# Altium PCB Payload PC104.PcbDoc (part 1 of 2)
Units mm, origin at the board's own origin, x right, y up, seen from the top; angles counter-clockwise.
Board outline 90.17 x 95.88 mm, 4 copper layers (Top Layer, Int1 (GND), Int2 (PWR), Bottom Layer), stack 1.586 mm thick; 82 components, 45 nets, 364 pads, 982 vias.
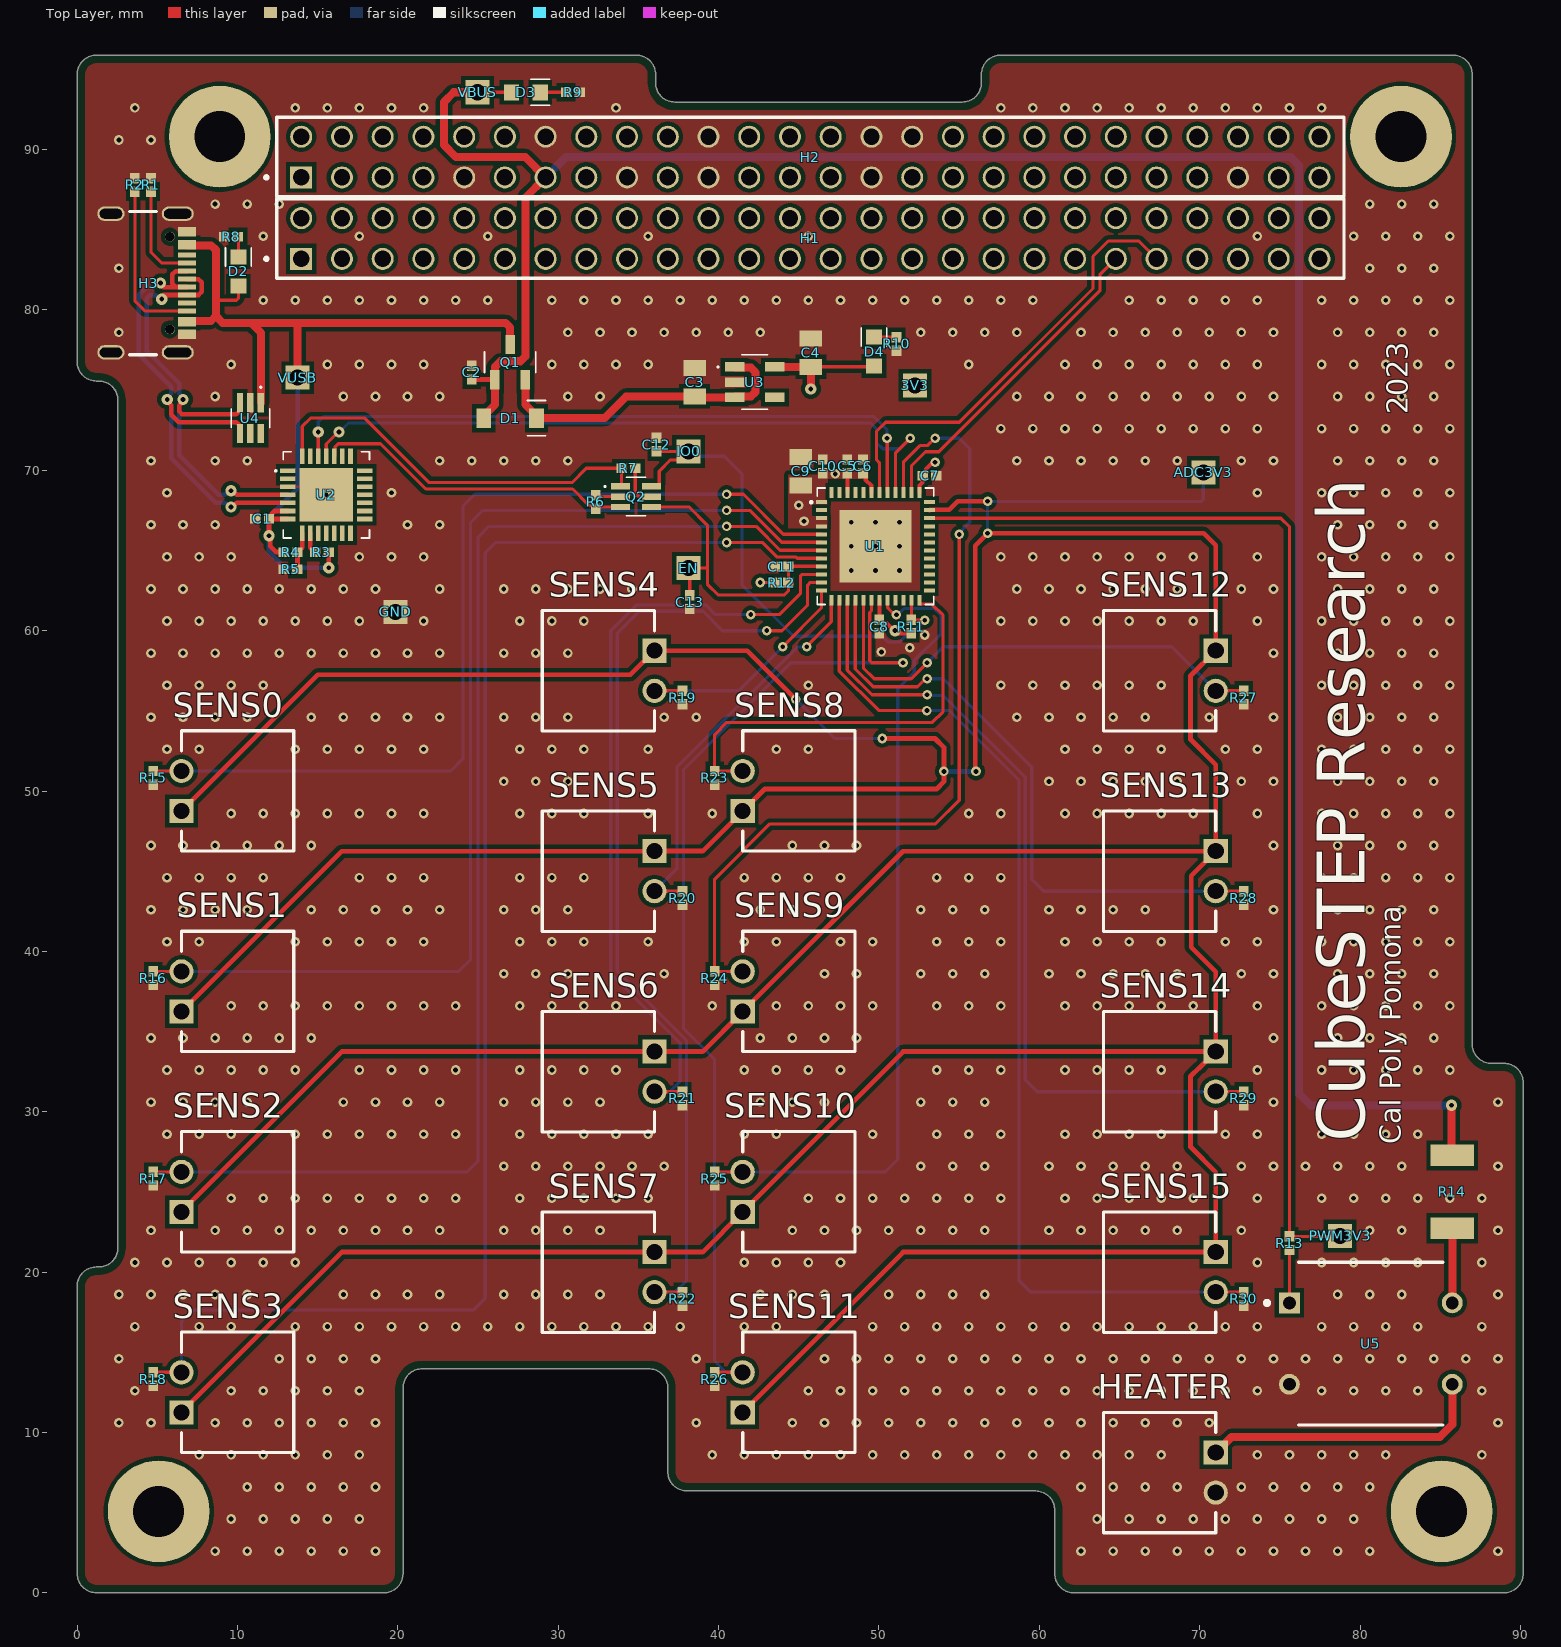
[diagram p0: Top Layer view]
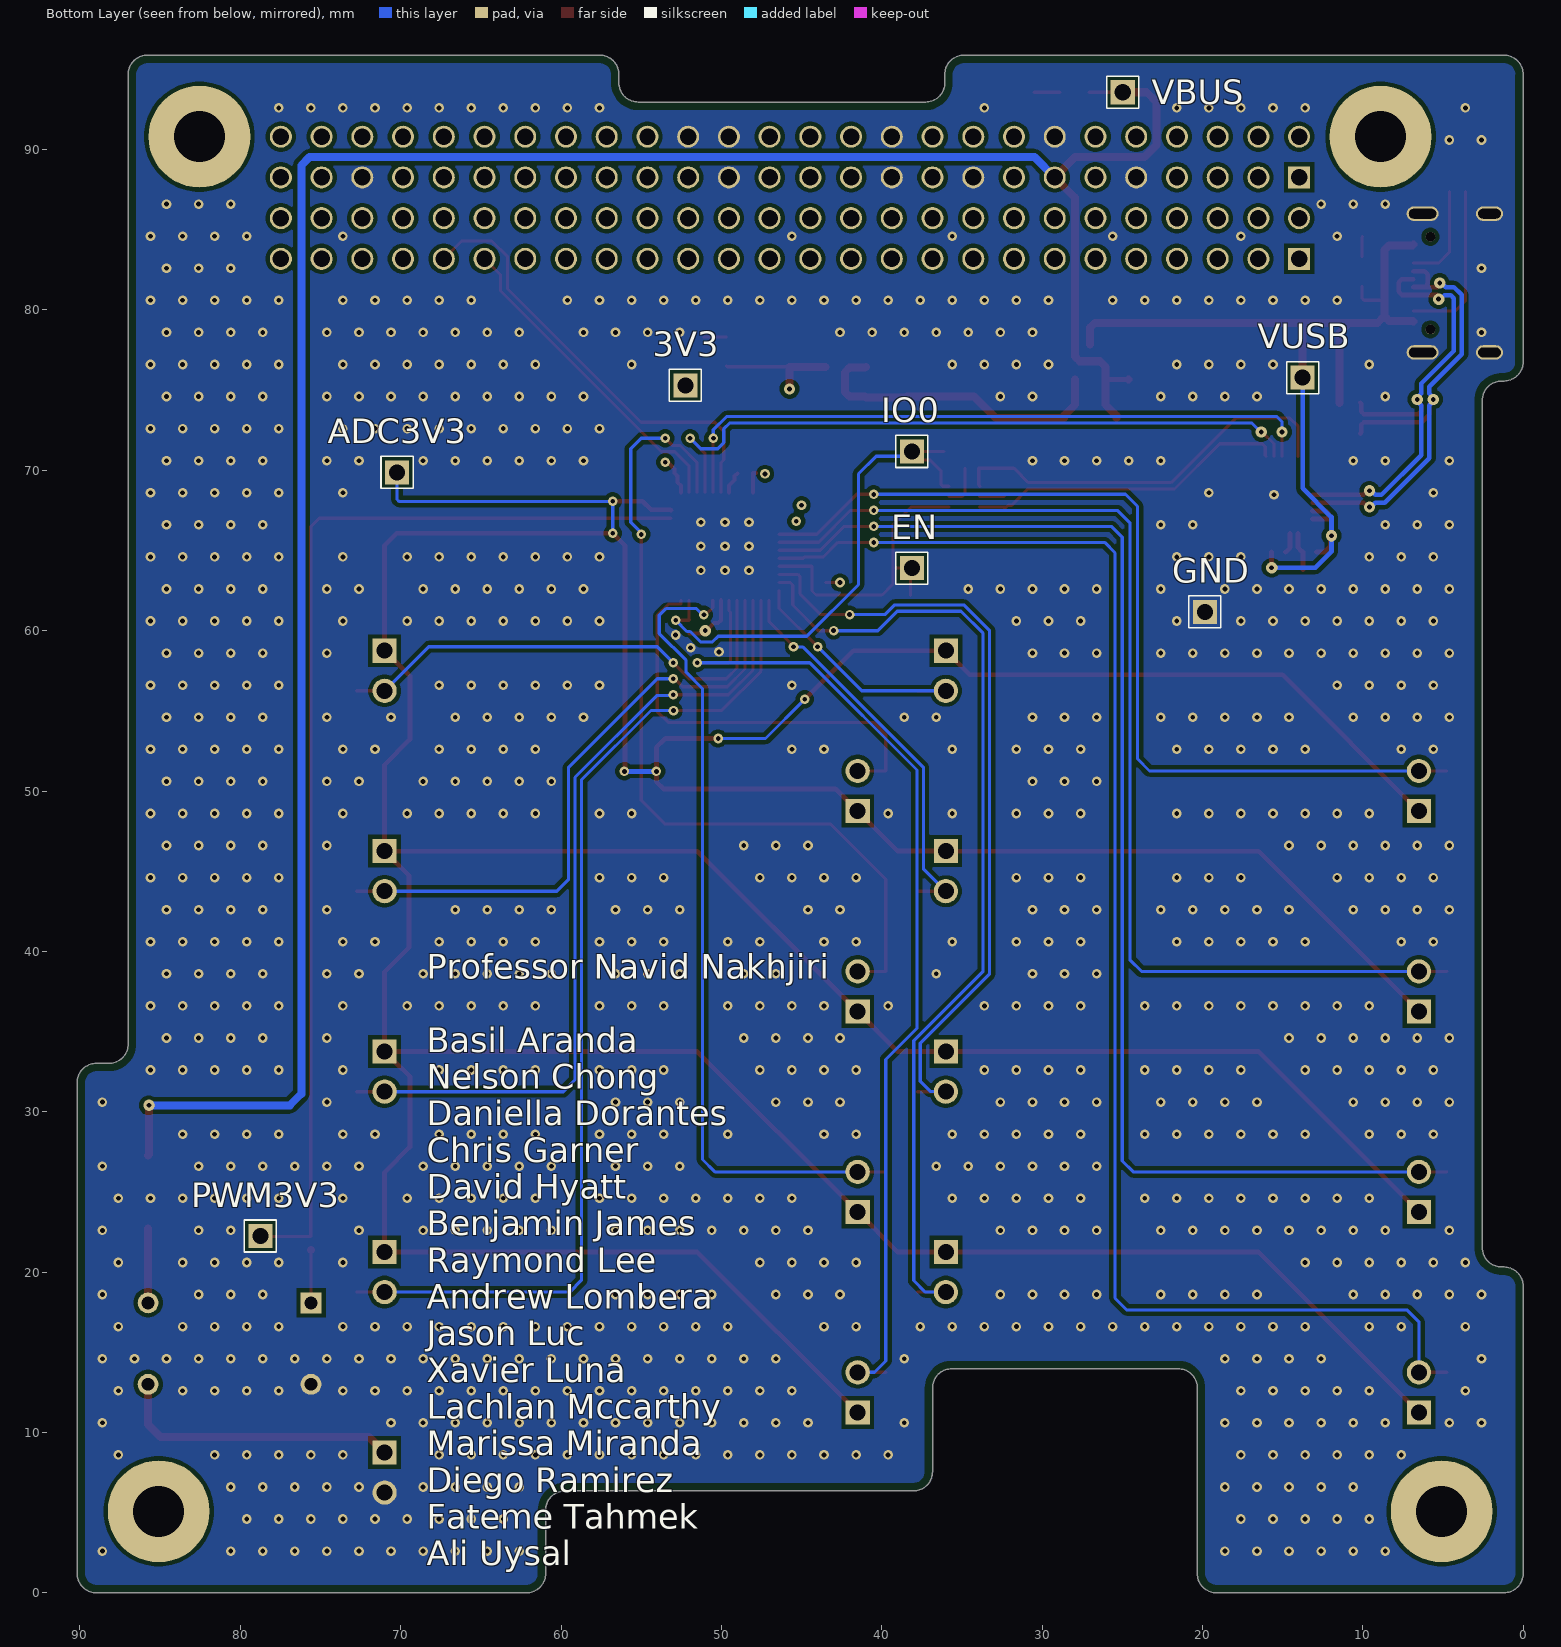
[diagram p1: Bottom Layer view, seen from below]
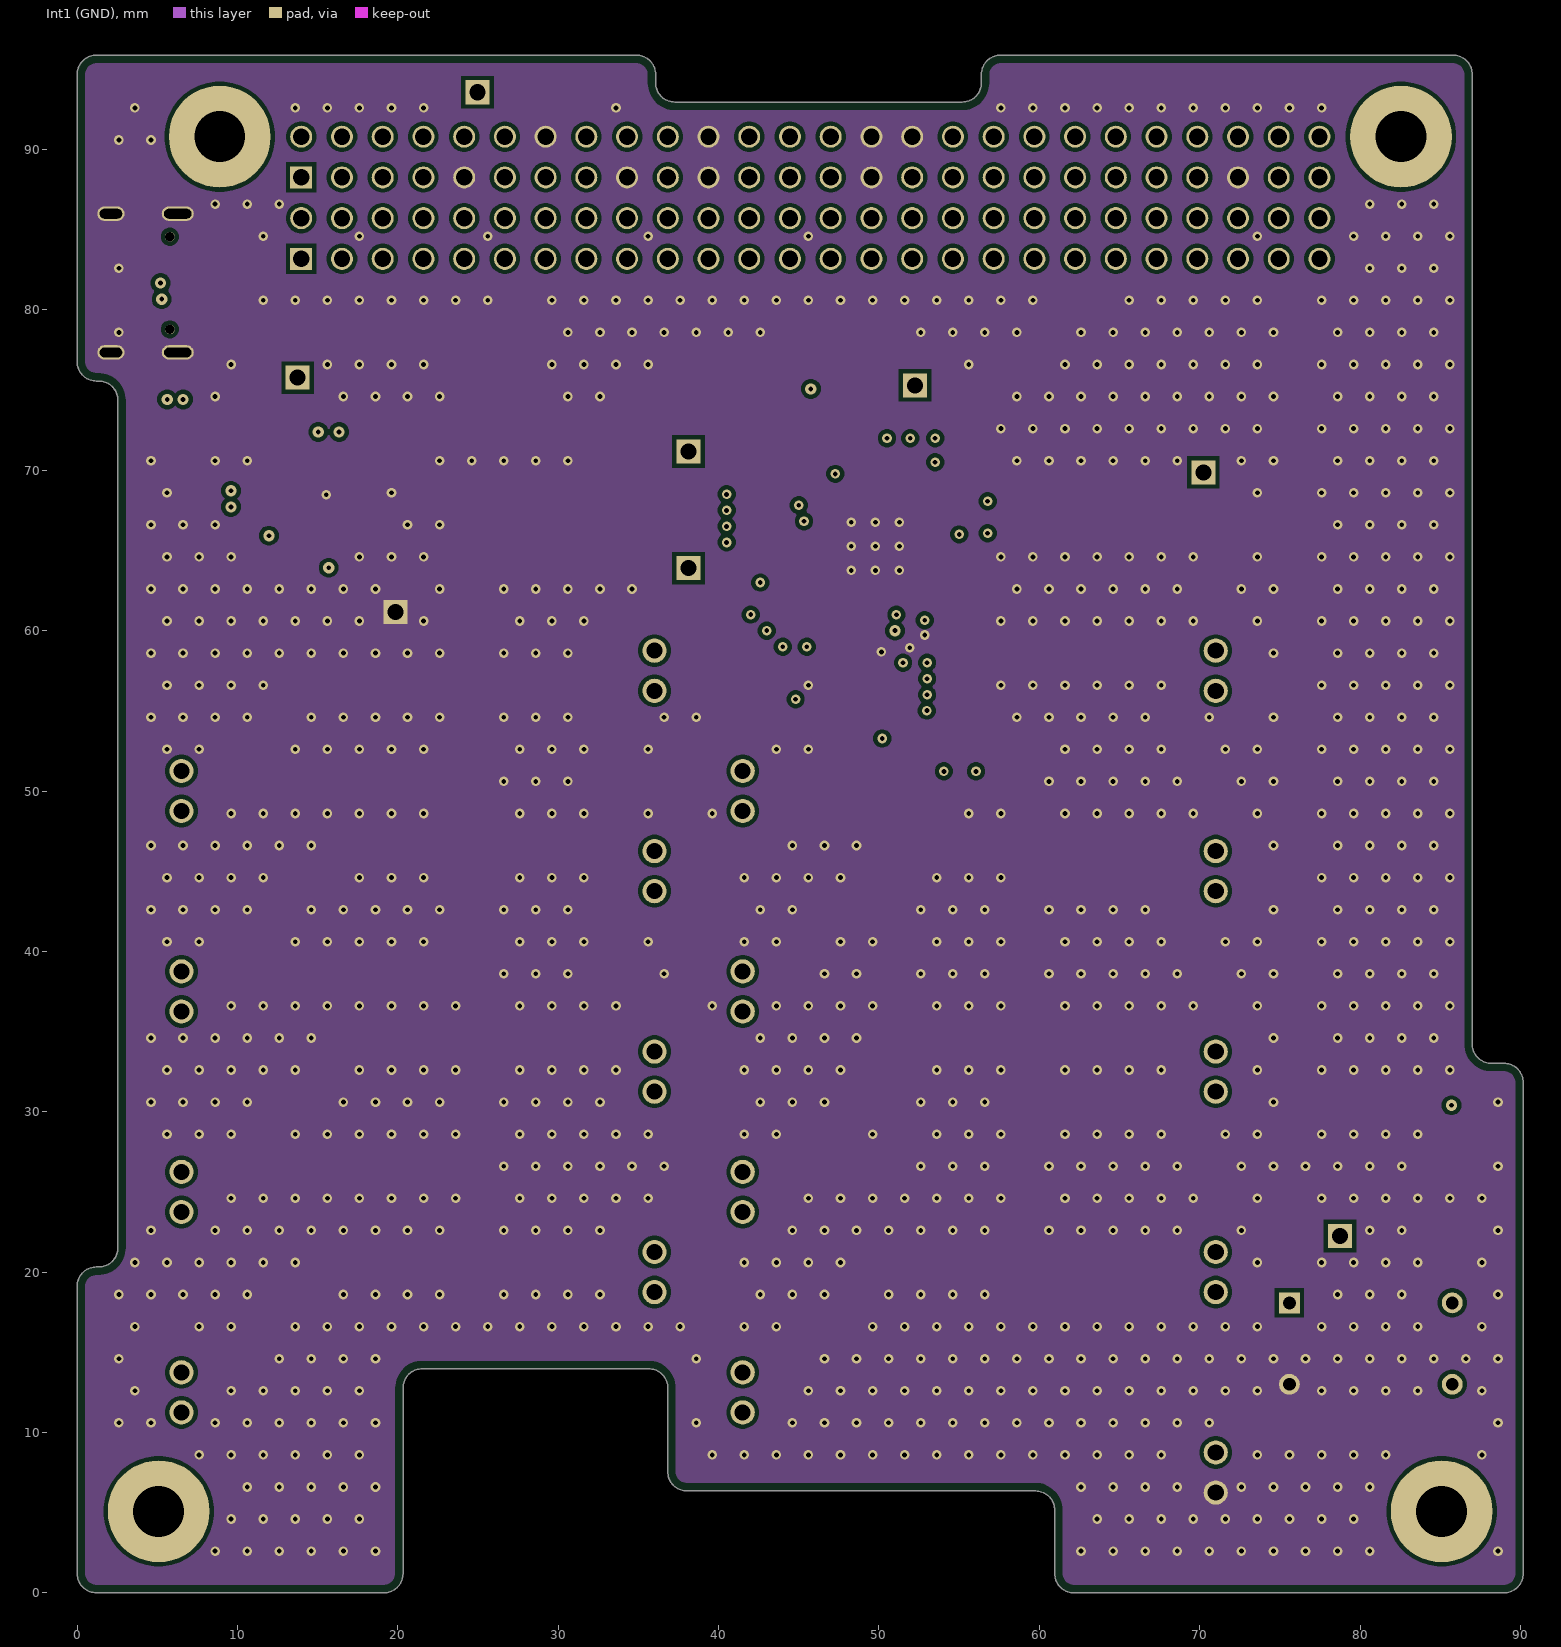
[diagram p2: Int1 (GND)]
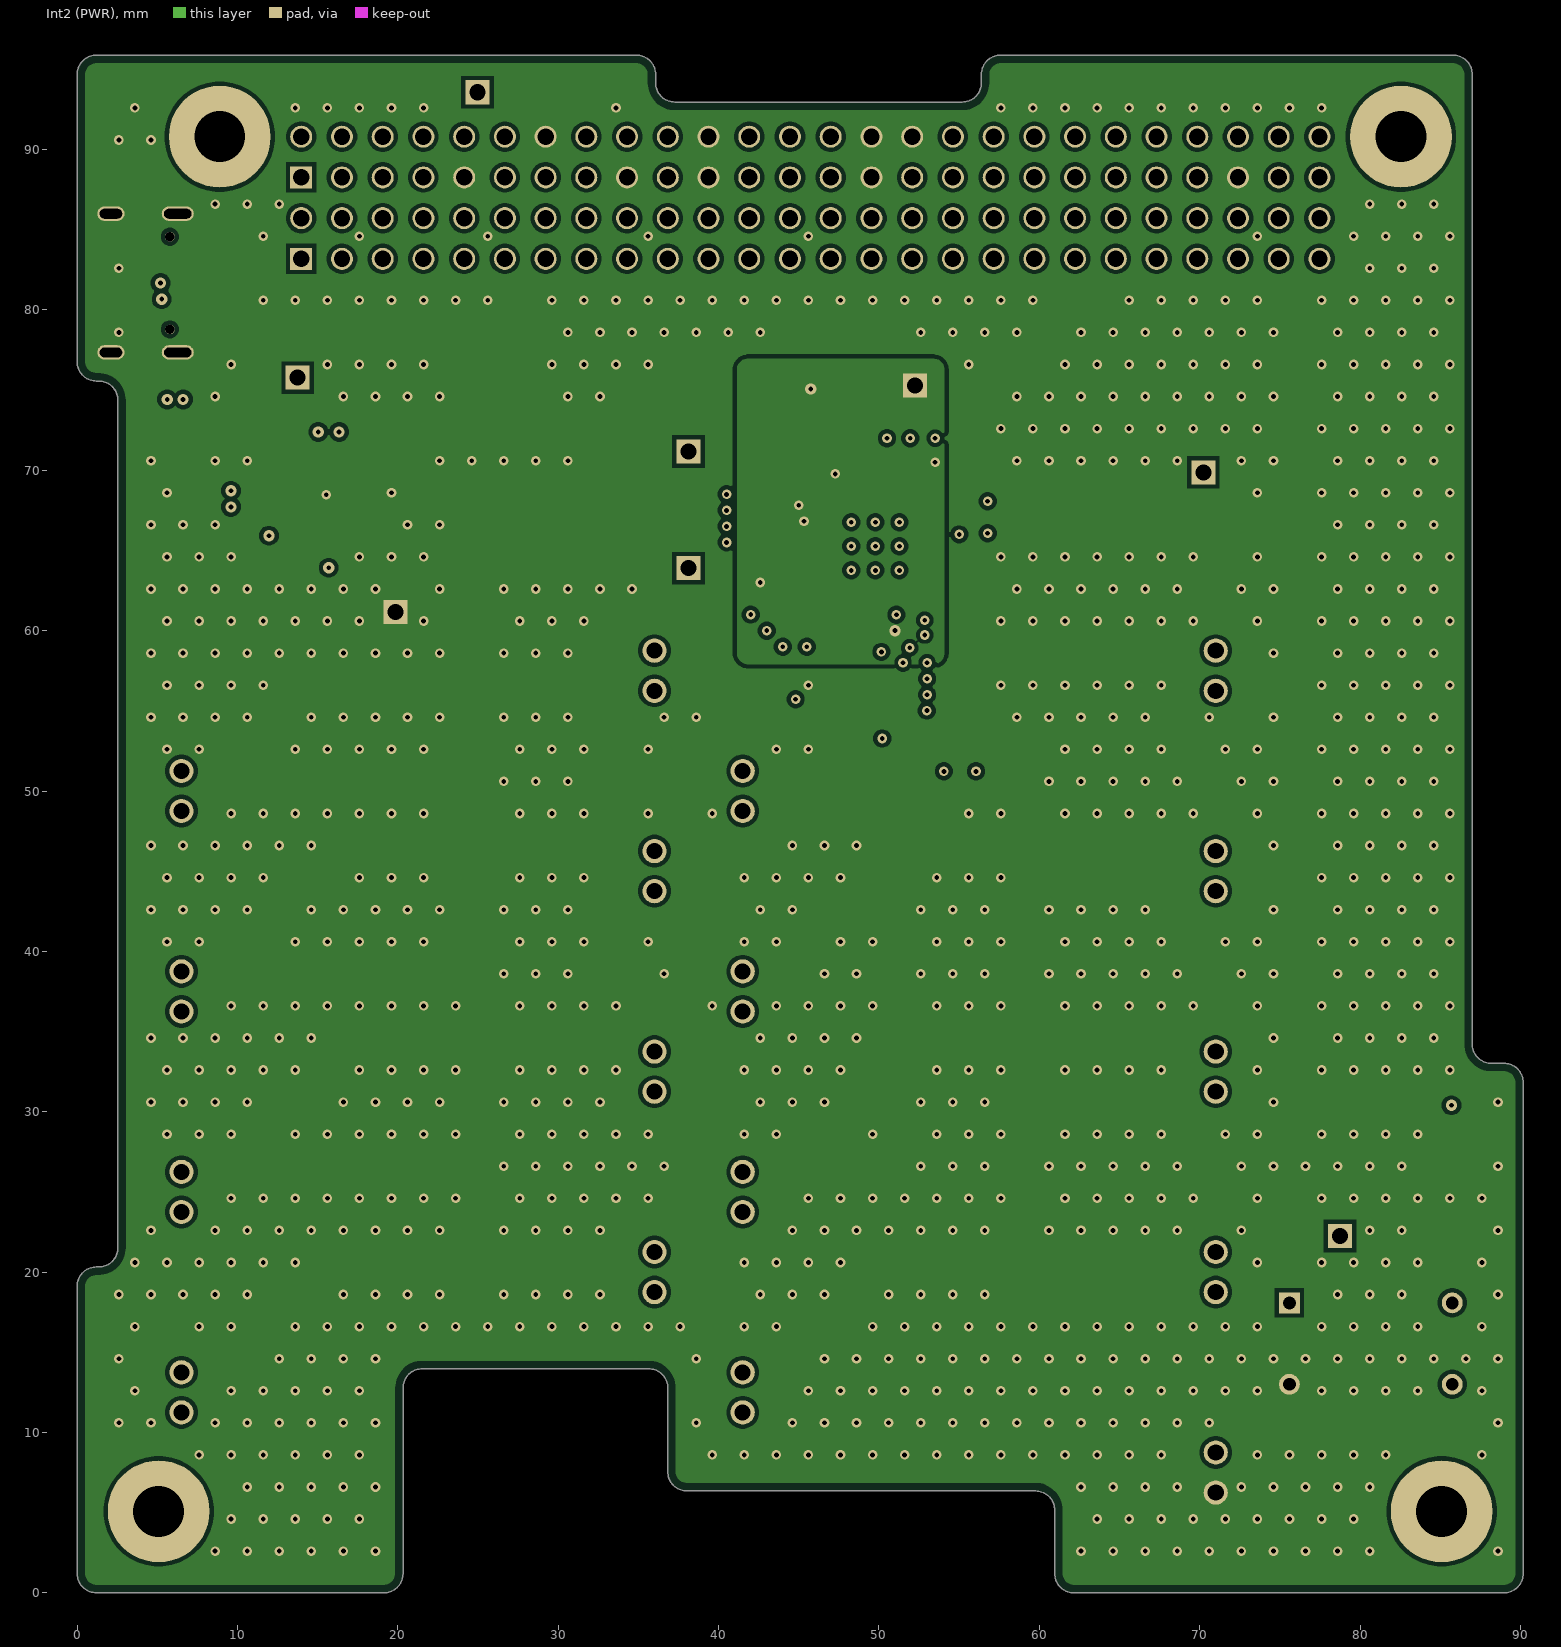
[diagram p3: Int2 (PWR)]
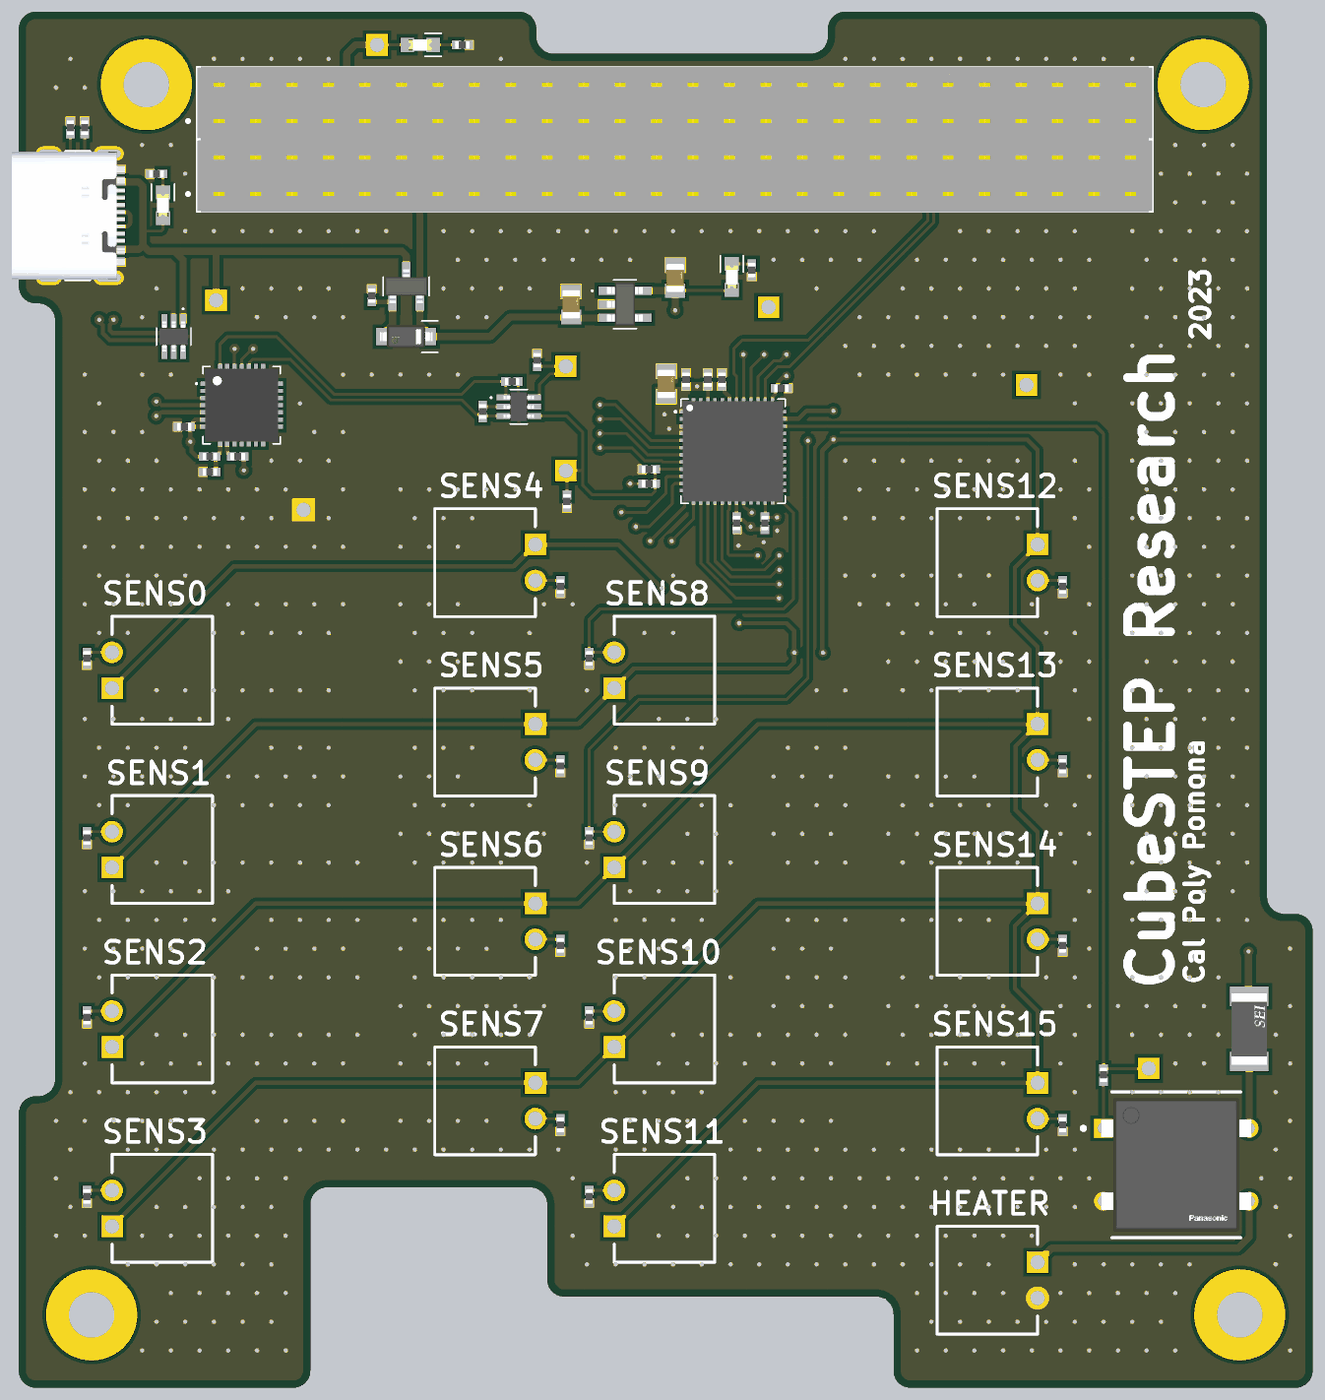
[diagram p5: 3D render of the assembled board from above, using the file's embedded part models]

## Layer stack, top to bottom
Top Solder: solder mask 0.0254, SM-001, Dk 3.8
Top Layer: signal copper 0.035
Dielectric 1: prepreg 0.2104, PP-017, Dk 4.4
Int1 (GND): signal copper 0.0152
Dielectric 3: core 1.065, Core-039, Dk 4.6
Int2 (PWR): signal copper 0.0152
Dielectric 5: prepreg 0.2104, PP-017, Dk 4.4
Bottom Layer: signal copper 0.035
Bottom Solder: solder mask 0.0254, SM-001, Dk 3.8

## Board outline
1.193,0.002 ccw(c1.196,0.002) 1.196,0 19.126,0 ccw(c19.126,1.194) 20.32,1.194 20.32,12.776 cw(c21.514,12.776) 21.514,13.97 35.636,13.97 cw(c35.636,12.776) 36.83,12.776 36.83,7.544 ccw(c38.024,7.544) 38.024,6.35 59.766,6.35 cw(c59.766,5.156) 60.96,5.156 60.96,1.194 ccw(c62.154,1.194) 62.154,0 88.976,0 ccw(c88.976,1.194) 90.17,1.194 90.17,31.826 ccw(c88.976,31.826) 88.968,33.02 88.189,33.02 cw(c88.189,34.214) 86.995,34.214 86.995,94.691 ccw(c85.801,94.691) 85.801,95.885 57.582,95.885 ccw(c57.582,94.691) 56.388,94.691 56.388,94.158 cw(c55.194,94.158) 55.194,92.964 37.262,92.964 cw(c37.262,94.158) 36.068,94.158 36.068,94.691 ccw(c34.874,94.691) 34.874,95.885 1.194,95.885 ccw(c1.194,94.691) 0,94.691 0,76.759 ccw(c1.194,76.759) 1.194,75.565 1.346,75.565 cw(c1.346,74.371) 2.54,74.371 2.54,21.514 cw(c1.346,21.514) 1.346,20.32 1.194,20.32 ccw(c1.194,19.126) 0,19.126 0,1.168 ccw(c1.193,1.196)

## Design rules (kind name [scope] priority, off if disabled: settings)
Clearance [All] p1: gap=0.254 ignorepadtopadclearanceinfootprint=FALSE except(0: SMDPad-Hole THPad-Hole Via-Hole Fill-Hole Poly-Hole Region-Hole Text-Hole; 0.127: SMDPad-SMDPad; 0.2: Arc-Arc Arc-Track Arc-SMDPad Track-Track Track-SMDPad SMDPad-THPad; 0.33: Arc-THPad Track-THPad; 0.5: THPad-THPad)
ComponentClearance [All] p1: gap=0.254 collisioncheckmode=3 verticalgap=0.254 showdistances=TRUE
DiffPairsRouting [All] p1: maxlimit=0.254 minlimit=0.203 mostfreqgap=0.254 toplayer_maxgap=0.203 toplayer_prefgap=0.203 toplayer_minwidth=0.286 toplayer_maxwidth=0.286 toplayer_prefwidth=0.286 bottomlayer_maxgap=0.203 bottomlayer_prefgap=0.203 bottomlayer_minwidth=0.286 bottomlayer_maxwidth=0.286 bottomlayer_prefwidth=0.286 impedanceprofiledriven=TRUE impedanceprofileid={F03DA9D0-52A6-4934-946C-810C32BBBE10} impedanceprofilevalue=90.000000 maxuncoupledlength=12.7
HoleSize [All] p1: absolutevalues=TRUE maxlimit=6.3 minlimit=0.3 maxpercent=80.000 minpercent=20.000
MinimumAnnularRing [All] p1: minimumring=0.13
MinimumSolderMaskSliver [All] p1: minsoldermaskwidth=0.1
PolygonConnect [All] p1: connectstyle=Direct reliefconductorwidth=0.254 reliefentries=4 polygonreliefangle="90 Angle" airgapwidth=0.254
RoutingCorners [All] p1: cornerstyle=45-Degree minsetback=1 maxsetback=1
RoutingVias [All] p1: holewidth=0.3 width=0.45 viastyle="Through Hole" minholewidth=0.3 minwidth=0.4 maxholewidth=1 maxwidth=1.15
SilkToSolderMaskClearance [IsPad] p1: minsilkscreentomaskgap=0.15 clearancetoexposedcopper=TRUE
SolderMaskExpansion [All] p1: expansion=0.05 istentingtop=FALSE
UnRoutedNet [All] p1: checkbadconnections=TRUE
Width [All] p1: maxlimit=0.5 minlimit=0.2 preferedwidth=0.2 minimp=50.000000 maximp=50.000000 favimp=50.000000
23 further rules are at their usual default settings.

## Classes and differential pairs
differential pair Data: +Data_P -Data_N

## Components (designator, comment, footprint, x,y, rotation, side; value= is the part's Value field where it differs from the comment)
3V3 "Test Point" "Test Point-Footprint-1" 52.25,75.3 r90 top
ADC3V3 "Test Point" "Test Point-Footprint-1" 70.225,69.875 r90 top
C1 "4.7uF" 0402_Capacitor 11.533,66.971 r180 top
C2 "1uF" 0402_Capacitor 24.6,76.1 r270 top
C3 "10uF" 0805_Capacitor_Murata 38.5,75.5 r90 top
C4 "10uF" 0805_Capacitor_Murata 45.75,77.339 r90 top
C5 "1uF" 0402_Capacitor 48.025,70.25 r90 top
C6 "100pF" 0402_Capacitor 49,70.25 r90 top
C7 "0.1uF" 0402_Capacitor 53.15,69.65 r180 top
C8 "0.1uF" 0402_Capacitor 50.025,60.25 r90 top
C9 "10uF" 0805_Capacitor_Murata 45.125,69.95 r90 top
C10 "0.1uF" 0402_Capacitor 46.5,70.25 r270 top
C11 "0.1uF" 0402_Capacitor 43.925,64 r180 top
C12 "0.1uF" 0402_Capacitor 36.125,71.6 r270 top
C13 "0.1uF" 0402_Capacitor 38.2,61.775 r90 top
D1 "MBR0520" SOD-123_Diode_Onsemi 27,73.25 r180 top
D2 "NCD0603R2" 0603_LED 10.05,82.4 r270 top
D3 "NCD0603R2" 0603_LED 27.976,93.574 r180 top
D4 "NCD0603R2" 0603_LED 49.694,77.406 r270 top
EN "Test Point" "Test Point-Footprint-1" 38.125,63.9 r0 top
GND "Test Point" "Test Point-Footprint-1" 19.85,61.175 r90 top
H1 "ESQ-126-39-G-D" ESQ-126-39-G-D 45.72,84.455 r0 top
H2 "ESQ-126-39-G-D" ESQ-126-39-G-D 45.72,89.535 r0 top
H3 "TYPE-C-31-M-12" TYPE-C-31-M-12-Footprint-1 3.776,81.675 r270 top
HEATER "JST-XH2.5-2p" 2.5_2p_Header 67.5,7.5 r270 top
IO0 "Test Point" "Test Point-Footprint-1" 38.125,71.175 r90 top
PWM3V3 "Test Point" "Test Point-Footprint-1" 78.75,22.25 r90 top
Q1 "FDN340P" SOT-23 27,76.75 r90 top
Q2 "BC847S" SC-70-6(SOT-363) 34.844,68.361 r0 top
R1 "5.1kΩ" 0402_Resistor 4.6,87.8 r270 top
R2 "5.1kΩ" 0402_Resistor 3.6,87.8 r270 top
R3 "4.7kΩ" 0402_Resistor 15.258,64.896 r0 top
R4 "22.1kΩ" 0402_Resistor 13.308,64.896 r180 top
R5 "47.5kΩ" 0402_Resistor 13.308,63.821 r0 top
R6 "10kΩ" 0402_Resistor 32.325,68.025 r90 top
R7 "10kΩ" 0402_Resistor 34.375,70.125 r0 top
R8 "1kΩ" 0402_Resistor 9.6,84.575 r180 top
R9 "1kΩ" 0402_Resistor 30.919,93.574 r0 top
R10 "1kΩ" 0402_Resistor 51.094,77.881 r270 top
R11 "10kΩ" 0402_Resistor 52,60.25 r90 top
R12 "10kΩ" 0402_Resistor 43.925,63 r0 top
R13 "2kΩ" 0402_Resistor 75.6,21.8 r270 top
R14 "1Ω" 2010_Resistor 85.75,25 r90 top
R15 "10kΩ" 0402_Resistor 4.75,50.825 r90 top
R16 "10kΩ" 0402_Resistor 4.75,38.325 r90 top
R17 "10kΩ" 0402_Resistor 4.75,25.825 r90 top
R18 "10kΩ" 0402_Resistor 4.75,13.325 r90 top
R19 "10kΩ" 0402_Resistor 37.75,55.825 r90 top
R20 "10kΩ" 0402_Resistor 37.75,43.325 r90 top
R21 "10kΩ" 0402_Resistor 37.75,30.825 r90 top
R22 "10kΩ" 0402_Resistor 37.75,18.325 r90 top
R23 "10kΩ" 0402_Resistor 39.75,50.825 r90 top
R24 "10kΩ" 0402_Resistor 39.75,38.325 r90 top
R25 "10kΩ" 0402_Resistor 39.75,25.825 r90 top
R26 "10kΩ" 0402_Resistor 39.75,13.325 r90 top
R27 "10kΩ" 0402_Resistor 72.75,55.825 r90 top
R28 "10kΩ" 0402_Resistor 72.75,43.325 r90 top
R29 "10kΩ" 0402_Resistor 72.75,30.825 r90 top
R30 "10kΩ" 0402_Resistor 72.75,18.325 r90 top
SENS0 "JST-XH2.5-2p" 2.5_2p_Header 10,50 r90 top
SENS1 "JST-XH2.5-2p" 2.5_2p_Header 10,37.5 r90 top
SENS2 "JST-XH2.5-2p" 2.5_2p_Header 10,25 r90 top
SENS3 "JST-XH2.5-2p" 2.5_2p_Header 10,12.5 r90 top
SENS4 "JST-XH2.5-2p" 2.5_2p_Header 32.5,57.5 r270 top
SENS5 "JST-XH2.5-2p" 2.5_2p_Header 32.5,45 r270 top
SENS6 "JST-XH2.5-2p" 2.5_2p_Header 32.5,32.5 r270 top
SENS7 "JST-XH2.5-2p" 2.5_2p_Header 32.5,20 r270 top
SENS8 "JST-XH2.5-2p" 2.5_2p_Header 45,50 r90 top
SENS9 "JST-XH2.5-2p" 2.5_2p_Header 45,37.5 r90 top
SENS10 "JST-XH2.5-2p" 2.5_2p_Header 45,25 r90 top
SENS11 "JST-XH2.5-2p" 2.5_2p_Header 45,12.5 r90 top
SENS12 "JST-XH2.5-2p" 2.5_2p_Header 67.5,57.5 r270 top
SENS13 "JST-XH2.5-2p" 2.5_2p_Header 67.5,45 r270 top
SENS14 "JST-XH2.5-2p" 2.5_2p_Header 67.5,32.5 r270 top
SENS15 "JST-XH2.5-2p" 2.5_2p_Header 67.5,20 r270 top
U1 "ESP32 PICO D4" QFN-48-EP(7x7) 49.775,65.26 r0 top
U2 "CP2102N" QFN-28-EP(5x5) 15.533,68.471 r0 top
U3 "HT7833" SOT-23-5 42.25,75.5 r0 top
U4 "PESD5V0L5UY" SOT-363 10.802,73.25 r270 top
U5 "AQY272" DIP4_AQY272_Panasonic 80.67,15.54 r0 top
VBUS "Test Point" "Test Point-Footprint-1" 24.968,93.575 r90 top
VUSB "Test Point" "Test Point-Footprint-1" 13.75,75.775 r90 top

## Footprints (in the part's own frame and the unit in brackets; to place one, negate y for a bottom-side part, rotate by r counter-clockwise, add the part's x,y. Pads: shape width x height; smd on the part's side, far side on the other; paste and mask are expansions set on the pad)
2.5_2p_Header [mm] "2.5mm TH 2position Header JST XH"
  rect 1.508x1.508 / inner round 1.508 / far side rect 1.508x1.508 hole 1: 1(-1.25,3.5)
  round 1.508 hole 1: 2(1.25,3.5)
  silkscreen extent -3.75,-3.5 3.76,3.5, body extent -3.7,-3.5 3.8,3.5, height 5.7
0402_Capacitor [mm] "0402 SMD Capacitor Generic"
  rect 0.65x0.6 smd: 1(-0.425,0) 2(0.425,0)
  body extent -0.5,-0.27 0.5,0.28, height 0.5
0402_Resistor [mm] "0402 SMD Resistor Generic"
  rect 0.65x0.6 smd: 1(-0.425,0) 2(0.425,0)
  body extent -0.5,-0.25 0.5,0.25, height 0.4
0603_LED [mm] "0603 SMD LED Generic"
  rect 0.95x1 smd: 1(-0.9,0) 2(0.9,0)
  silkscreen extent -1.48,-0.8 -0.33,0.8, body extent -0.8,-0.4 0.8,0.4, height 0.6
0805_Capacitor_Murata [mm] "0805 SMD Capacitor Murata Electronics"
  rect 1x1.4 smd: 1(-0.889,0) 2(0.889,0)
  body extent -1.3,-0.77 1.3,0.77, height 0.25
2010_Resistor [mm] "2010 SMD Resistor Stackpole Electronics"
  rect 1.35x2.7 smd: 1(-2.275,0) 2(2.275,0)
  body extent -3.65,-1.9 3.65,1.9, height 0.25
DIP4_AQY272_Panasonic [mm] "DIP4 8.8mm x 9.3mm TH AQY272 Panasonic Industry"
  rect 1.3x1.3 hole 0.8 paste-2539.97 mask+0: 1(-5.08,2.54)
  round 1.3 hole 0.8 paste-2539.97 mask+0: 2(-5.08,-2.54) 3(5.08,-2.54) 4(5.08,2.54)
  silkscreen extent -6.6,-5.08 4.5,5.08, body extent -5.83,-4.85 5.83,4.85, height 0.25
ESQ-126-39-G-D [mm]
  rect 1.37x1.37 hole 1.02: 01(-31.75,-1.27)
  round 1.37 hole 1.02: 02(-31.75,1.27) 03(-29.21,-1.27) 04(-29.21,1.27) 05(-26.67,-1.27) 06(-26.67,1.27) 07(-24.13,-1.27) 08(-24.13,1.27) 09(-21.59,-1.27) 10(-21.59,1.27) 11(-19.05,-1.27) 12(-19.05,1.27) 13(-16.51,-1.27) 14(-16.51,1.27) 15(-13.97,-1.27) 16(-13.97,1.27) 17(-11.43,-1.27) 18(-11.43,1.27) 19(-8.89,-1.27) 20(-8.89,1.27) 21(-6.35,-1.27) 22(-6.35,1.27) 23(-3.81,-1.27) 24(-3.81,1.27) 25(-1.27,-1.27) 26(-1.27,1.27) 27(1.27,-1.27) 28(1.27,1.27) 29(3.81,-1.27) 30(3.81,1.27) 31(6.35,-1.27) 32(6.35,1.27) 33(8.89,-1.27) 34(8.89,1.27) 35(11.43,-1.27) 36(11.43,1.27) 37(13.97,-1.27) 38(13.97,1.27) 39(16.51,-1.27) 40(16.51,1.27) 41(19.05,-1.27) 42(19.05,1.27) 43(21.59,-1.27) 44(21.59,1.27) 45(24.13,-1.27) 46(24.13,1.27) 47(26.67,-1.27) 48(26.67,1.27) 49(29.21,-1.27) 50(29.21,1.27) 51(31.75,-1.27) 52(31.75,1.27)
  silkscreen extent -34.02,-2.47 33.28,2.47, body extent -33.27,-2.54 33.27,2.54, height 11.07
QFN-28-EP(5x5) [mm] "QFN-28-EP(5x5) SMD IC Generic"
  rect 0.95x0.3 smd mask+0.05: 1(-2.4,1.5) 2(-2.4,1) 3(-2.4,0.5) 4(-2.4,0) 5(-2.4,-0.5) 6(-2.4,-1) 7(-2.4,-1.5) 15(2.4,-1.5) 16(2.4,-1) 17(2.4,-0.5) 18(2.4,0) 19(2.4,0.5) 20(2.4,1) 21(2.4,1.5)
  rect 0.3x0.95 smd mask+0.05: 8(-1.5,-2.4) 9(-1,-2.4) 10(-0.5,-2.4) 11(0,-2.4) 12(0.5,-2.4) 13(1,-2.4) 14(1.5,-2.4) 22(1.5,2.4) 23(1,2.4) 24(0.5,2.4) 25(0,2.4) 26(-0.5,2.4) 27(-1,2.4) 28(-1.5,2.4)
  rect 3.35x3.35 smd mask+0.05: 29(0,0)
  silkscreen extent -3.16,-2.69 2.69,2.69, body extent -2.55,-2.55 2.55,2.55, height 1
QFN-48-EP(7x7) [mm] "QFN-48-EP(7x7) SMD IC Generic"
  rect 0.68x0.25 smd mask+0.05: 1(-3.365,2.75) 2(-3.365,2.25) 3(-3.365,1.75) 4(-3.365,1.25) 5(-3.365,0.75) 6(-3.365,0.25) 7(-3.365,-0.25) 8(-3.365,-0.75) 9(-3.365,-1.25) 10(-3.365,-1.75) 11(-3.365,-2.25) 12(-3.365,-2.75) 25(3.365,-2.75) 26(3.365,-2.25) 27(3.365,-1.75) 28(3.365,-1.25) 29(3.365,-0.75) 30(3.365,-0.25) 32(3.365,0.75) 33(3.365,1.25) 34(3.365,1.75) 35(3.365,2.25) 36(3.365,2.75)
  rect 0.25x0.68 smd mask+0.05: 13(-2.75,-3.365) 14(-2.25,-3.365) 15(-1.75,-3.365) 16(-1.25,-3.365) 17(-0.75,-3.365) 18(-0.25,-3.365) 19(0.25,-3.365) 20(0.75,-3.365) 21(1.25,-3.365) 22(1.75,-3.365) 23(2.25,-3.365) 24(2.75,-3.365) 37(2.75,3.365) 38(2.25,3.365) 39(1.75,3.365) 40(1.25,3.365) 41(0.75,3.365) 42(0.25,3.365) 43(-0.25,3.365) 44(-0.75,3.365) 45(-1.25,3.365) 46(-1.75,3.365) 47(-2.25,3.365) 48(-2.75,3.365)
  rrect5% 0.68x0.25 smd mask+0.05: 31(3.365,0.25)
  rect 4.5x4.5 smd: 49(0,0)
  silkscreen extent -4.01,-3.63 3.63,3.63, body extent -3.5,-3.5 3.5,3.5, height 1.05
SC-70-6(SOT-363) [mm] "SOT-363 SMD IC Generic"
  rect 1.19x0.4 smd: 1(-0.96,0.65) 2(-0.96,0) 3(-0.96,-0.65) 4(0.96,-0.65) 5(0.96,0) 6(0.96,0.65)
  silkscreen extent -1.93,-1.2 0.6,1.2, body extent -1.05,-1 1.05,1, height 1.1
SOD-123_Diode_Onsemi [mil] "SOD-123 SMD Diode Onsemi Semiconductor"
  rect 36x48 smd: 1(-64.5,0) 2(64.5,0)
  silkscreen extent -87,-43 -42,43, body extent -86,-39 86,39, height 10
SOT-23 [mm] "SOT-23 SMD IC Generic"
  rect 1.2x0.6 smd: 1(-1.1,0.95) 2(-1.1,-0.95) 3(1.1,0)
  silkscreen extent -0.65,-1.6 0.65,1.6, body extent -1.18,-1.46 1.18,1.46, height 1.12
SOT-23-5 [mm] "SOT-23-5 SMD IC Generic"
  rect 1.21x0.59 smd: 1(-1.255,0.95) 2(-1.255,0) 3(-1.255,-0.95) 4(1.255,-0.95) 5(1.255,0.95)
  silkscreen extent -2.29,-1.7 0.8,1.7, body extent -1.25,-1.5 1.25,1.5, height 1.1
SOT-363 [mm] "SOT-363 SMD IC Generic"
  rect 1.19x0.4 smd: 1(-0.96,0.65) 2(-0.96,0) 3(-0.96,-0.65) 4(0.96,-0.65) 5(0.96,0) 6(0.96,0.65)
  silkscreen extent -1.93,-1.2 0.6,1.2, body extent -1.05,-1 1.05,1, height 1.1
"Test Point-Footprint-1" [mm]
  rect 1.5x1.5 hole 1: 1(0,0)
TYPE-C-31-M-12-Footprint-1 [mm]
  rect 0.6x1.14 smd mask+0.05: A1_B12(-3.2,3.074) A4_B9(-2.4,3.074) B1_A12(3.2,3.074) B4_A9(2.4,3.074)
  rect 0.3x1.14 smd mask+0.05: A5(-1.25,3.074) A6(-0.25,3.074) A7(0.25,3.074) A8(1.25,3.074) B5(1.75,3.074) B6(0.75,3.074) B7(-0.75,3.074) B8(-1.75,3.074)
  round 0.6 hole 0.6 unplated: PTH(-2.89,2.004) PTH(2.89,2.004)
  oval 0.9x2 hole 0.6 slot 1.7 at 90 deg: S1(-4.325,2.494) S2(4.325,2.494)
  oval 0.9x1.7 hole 0.6 slot 1.4 at 90 deg: S3(-4.325,-1.676) S4(4.325,-1.676)
  silkscreen extent -4.47,-0.51 4.47,1.17, body extent -4.47,-4.28 4.47,3.63, height 3.31

## Part data
3V3 ADC3V3 EN GND IO0 PWM3V3 VBUS VUSB: library part CMP-00032-2, "Signal test point"
C1: library part CMP-00010-12, "±20% 16V X5R SMD 0402", JLCPCB Part #=C697614, Manufacturer=--, Max Operating Temperature=85°C, Min Operating Temperature=-55°C, Overload Voltage=16V, Part Number=CM05X5R475M16AH, Temperature Coefficient=X5R, Tolerance=±20%, Capacitance=4.7uF, Mount="Surface Mount", Type=Ceramic
C2 C5: library part CMP-00014-10, "±10% 16V X5R SMD 0402", JLCPCB Part #=C77006, Manufacturer="Murata Electronics", Max Operating Temperature=85°C, Min Operating Temperature=-55°C, Overload Voltage=16V, Part Number=GRM155R61C105KA12D, Temperature Coefficient=X5R, Tolerance=±10%, Capacitance=1uF, ComponentLink1Description=JLCPCB, ComponentLink1URL=https://jlcpcb.com/partdetail/MurataElectronics-GRM155R61C105KA12D/C77006, Mount="Surface Mount", Size Code=0402, Type=Ceramic
C3 C4 C9: library part CMP-00013-10, "±10% 16V B SMD 0805", JLCPCB Part #=C162317, Manufacturer="Murata Electronics", Max Operating Temperature=85°C, Min Operating Temperature=-25°C, Overload Voltage=16V, Part Number=GRM21BB31C106KE15L, Temperature Coefficient=B, Tolerance=±10%, Capacitance=10uF, Mount="Surface Mount", Type=Ceramic
C6: library part CMP-00020-1, "±10% 16V X5R SMD 0402", JLCPCB Part #=C541374, Manufacturer=YAGEO, Max Operating Temperature=125°C, Min Operating Temperature=-55°C, Overload Voltage=16V, Part Number=CC0402KRX7R7BB101, Temperature Coefficient=X7R, Tolerance=±10%, Capacitance=100pF, JLCPCB=https://jlcpcb.com/partdetail/Yageo-CC0402KRX7R7BB101/C541374, Mount="Surface Mount", Size Code=0402, Type=Ceramic
C7 C8 C10 C11 C12 C13: library part CMP-00011-10, "±20% 16V X5R SMD 0402", JLCPCB Part #=C344190, Manufacturer=CCTC, Max Operating Temperature=85°C, Min Operating Temperature=-55°C, Overload Voltage=16V, Part Number=TCC0402X5R104M160AT, Temperature Coefficient=X5R, Tolerance=±20%, Capacitance=0.1uF, Mount="Surface Mount", Type=Ceramic
D1: library part CMP-00018-12, "Rectifier Diode, Schottky, 1 Phase, 1 Element, 0.5A, 20V V(RRM), Silicon", Forward Voltage-Max (VF)=385mV, JLCPCB Part #=C475717, Max Operating Temperature=125°C, Max Output Current=500mA, Min Operating Temperature=-65°C, Non-rep Pk Forward Current-Max=5.5A, Package Body Material=Plastic, Package Shape=Rectangular, Package Style="SMALL OUTLINEMeter", Peak Reflow Temperature (Cel)=260°C, Rep Pk Reverse Voltage-Max=20V, Time @ Peak Reflow Temperature-Max (s)=30s, Additional Feature="FREE WHEELING DIODE", Diode Element Material=SILICON, Diode Type=RECTIFIER, JESD-30 Code=R-PDSO-G2, JESD-609 Code=e3, Moisture Sensitivity Level=1, Number of Elements=1, Number of Pins=2, Qualification Status="Not Qualified", Reach SVHC Compliant=Yes, RoHS Compliant=Yes, Surface Mount=Yes, Technology=SCHOTTKY, Terminal Finish=Tin, Terminal Form="Gull Wing", Terminal Position=DUAL
D2 D3 D4: library part CMP-00019-7, "Colorless transparence 65mcd~150mcd 615nm~630nm -30℃~+85℃ Red 130° 65mW 0603 Light Emitting Diodes (LED) ROHS", Emitted Color=Red, Forward Current=20mA, Forward Voltage (VF)=1.6V~2.6V, JLCPCB Part #=C90692, Lens Color="Colorless transparence", Operating Temperature=-30℃~+85℃, Power Dissipation=65mW, Dominant Wavelength=615nm~630nm, Lumunous Intensity=65mcd~150mcd, Viewing Angle=130°
H1 H2: library part CMP-00000-5, "Board Connector, 52 Contact(s), 2 Row(s), Female, Straight, 0.1 inch Pitch, Solder Terminal, Locking, Black Insulator, Socket", Contact Resistance=10mR, Insulation Color=Black, Max Operating Temperature=125°C, Min Operating Temperature=-55°C, Rated Current (Signal)=5.7A, Body Breadth=0.195inch, Body Depth=0.435inch, Body Length=2.62inch, Body/Shell Style=SOCKET, Connector Type="BOARD CONNECTOR", Contact Finish - Mating="GOLD (20) OVER NICKEL (50)", Contact Finish - Termination="Gold (Au) - with Nickel (Ni) barrier", Contact Gender=Female, Contact Material=Bronze, Contact Pattern=RECTANGULAR, Contact Style="SQ PIN-SKT", DIN Conformance=No, Filter Feature=No, IEC Conformance=No, Insulation Material=Thermoplastic, JESD-609 Code=e4, Mating Contact Pitch=0.1inch, Mating Contact Row Spacing=0.1inch, Mating Information="MULTIPLE MATING PARTS AVAILABLE", MIL Conformance=No, Mixed Contacts=No, Mount=Board, Mounting Option 1=LOCKING, Mounting Style=STRAIGHT, Number Of Connectors=1, Number of Contacts=52, Number Of PCB Rows=2, Number of Rows Loaded=2, Option="General Purpose", PCB Contact Pattern=RECTANGULAR, PCB Contact Row Spacing=2.54mm, Plating Thickness=20uin, Polarization Key="POLARIZED HOUSING", Reach SVHC Compliant=Yes, Reference Standard=UL, Reliability=COMMERCIAL, RoHS Compliant=Yes, Terminal Length=0.48inch, Terminal Pitch=2.54mm, Termination=Solder
H3: library part CMP-00003-9, "5A 1 16P Female Type-C SMD USB Connectors ROHS", JLCPCB Part #=C165948
HEATER SENS0 SENS1 SENS2 SENS3 SENS4 SENS5 SENS6 SENS7 SENS8 SENS9 SENS10 SENS11 SENS12 SENS13 SENS14 SENS15: library part CMP-00005-8, "1x2P XH 1 2.5mm 2 Brass Push-Pull,P=2.5mm Wire To Board / Wire To Wire Connector ROHS", JLCPCB Part #=C132479, Manufacturer="Ckmtw(Shenzhen Cankemeng)", Package=Push-Pull,P=2.5mm, Assembly="Wave Soldering"
Q1: library part CMP-00008-5, "SOT-23 MOSFETs ROHS", Drain Current-Max (Abs) (ID)=2A, Drain-source On Resistance-Max=70R, DS Breakdown Voltage-Min=20V, JLCPCB Part #=C347510, Max Operating Temperature=150°C, Operating Mode="ENHANCEMENT MODE", Package Body Material=Plastic, Package Shape=Rectangular, Package Style="SMALL OUTLINEMeter", Power Dissipation-Max (Abs)=500mW, Drain Current-Max (ID)=2A, FET Technology="METAL-OXIDE SEMICONDUCTOR", JESD-30 Code=R-PDSO-G3, JESD-609 Code=e3, Moisture Sensitivity Level=1, Number of Elements=1, Number of Pins=3, Polarity/Channel Type=P-CHANNEL, Qualification Status="Not Qualified", Reach SVHC Compliant=Yes, RoHS Compliant=Yes, Surface Mount=Yes, Terminal Finish=Tin, Terminal Form="Gull Wing", Terminal Position=DUAL, Transistor Application=SWITCHING, Transistor Element Material=SILICON
Q2: library part CMP-00009-9, "Small Signal Bipolar Transistor, 0.1A I(C), 45V V(BR)CEO, 2-Element, NPN, Silicon", Collector-emitter Voltage-Max=45V, DC Current Gain-Min (hFE)=200, JLCPCB Part #=C148112, Max Collector Current=100mA, Max Operating Temperature=150°C, Package Body Material=Plastic, Package Shape=Rectangular, Package Style="SMALL OUTLINEMeter", Transition Frequency-Nom (fT)=250MHz, JESD-30 Code=R-PDSO-G6, Moisture Sensitivity Level=1, Number of Elements=2, Number of Pins=6, Polarity/Channel Type=NPN, Qualification Status="Not Qualified", Reach SVHC Compliant=Yes, RoHS Compliant=Yes, Surface Mount=Yes, Terminal Form="Gull Wing", Terminal Position=DUAL, Transistor Application=AMPLIFIER, Transistor Element Material=SILICON
R1 R2: library part CMP-00031-23, "±0.5% 62.5mW 50V SMD 0402", JLCPCB Part #=C423276, Manufacturer="UNI-ROYAL(Uniroyal Elec)", Max Operating Temperature=155°C, Min Operating Temperature=-55°C, Overload Voltage=50V, Part Number=0402WGD5101TCE, Power=62.5mW, Resistor Type=Fixed, Temperature Coefficient=±100ppm/°C, Tolerance=±0.5%, Mount="Surface Mount", Resistance=5.1kΩ, Type="Thick Film"
R3: library part CMP-00024-22, "±1% 62.5mW 50V SMD 0402", JLCPCB Part #=C105871, Manufacturer=YAGEO, Max Operating Temperature=155°C, Min Operating Temperature=-55°C, Overload Voltage=50V, Part Number=RC0402FR-074K7L, Power=62.5mW, Resistor Type=Fixed, Temperature Coefficient=±100ppm/°C, Tolerance=±1%, Mount="Surface Mount", Resistance=4.7kΩ, Type="Thick Film"
R4: library part CMP-00022-22, "±1% 62.5mW50V SMD 0402", JLCPCB Part #=C163478, Manufacturer=YAGEO, Max Operating Temperature=155°C, Min Operating Temperature=-55°C, Overload Voltage=50V, Part Number=RC0402FR-0722K1L, Power=62.5mW, Resistor Type=Fixed, Temperature Coefficient=±100ppm/°C, Tolerance=±1%, Mount="Surface Mount", Resistance=22.1kΩ, Type="Thick Film"
R5: library part CMP-00029-21, "±1% 62.5mW 50V SMD 0402", JLCPCB Part #=C137974, Manufacturer=YAGEO, Max Operating Temperature=155°C, Min Operating Temperature=-55°C, Overload Voltage=50V, Part Number=RC0402FR-0747K5L, Power=62.5mW, Resistor Type=Fixed, Temperature Coefficient=±100ppm/°C, Tolerance=±1%, Mount="Surface Mount", Resistance=47.5kΩ, Type="Thick Film"
R6 R7 R11 R12 R15 R16 R17 R18 R19 R20 R21 R22 R23 R24 R25 R26 R27 R28 R29 R30: library part CMP-00021-24, "±1% 62.5mW 50V SMD 0402", JLCPCB Part #=C258091, Manufacturer="FH (Guangdong Fenghua Advanced Tech)", Max Operating Temperature=155°C, Min Operating Temperature=-55°C, Overload Voltage=50V, Part Number=RC-02W1002FT, Power=62.5mW, Resistor Type=Fixed, Temperature Coefficient=±200ppm/℃, Tolerance=±1%, Mount="Surface Mount", Resistance=10kΩ, Type="Thick Film"
R8 R9 R10: library part CMP-00025-21, "±1% 62.5mW 50V SMD 0402", JLCPCB Part #=C106235, Manufacturer=YAGEO, Max Operating Temperature=155°C, Min Operating Temperature=-55°C, Overload Voltage=50V, Part Number=RC0402FR-071KL, Power=62.5mW, Resistor Type=Fixed, Temperature Coefficient=±100ppm/°C, Tolerance=±1%, Mount="Surface Mount", Resistance=1kΩ, Type="Thick Film"
R13: library part CMP-00027-22, "±1% 62.5mW 50V SMD 0402", JLCPCB Part #=C100291, Manufacturer="LIZ Elec", Max Operating Temperature=125°C, Min Operating Temperature=-55°C, Overload Voltage=50V, Part Number=CR0402FF2001G, Power=62.5mW, Resistor Type=Fixed, Temperature Coefficient=±200ppm/℃, Tolerance=±1%, Mount="Surface Mount", Resistance=2kΩ, Type="Thick Film"
R14: library part CMP-00017-16, "±5% 0.75W 200V SMD 2010", JLCPCB Part #=C137062, Manufacturer=RALEC, Max Operating Temperatrure=155°C, Min Operating Temperature=-55°C, Overload Voltage=200V, Part Number=RTT201R00FTE, Power=750mW, Resistor Type=Fixed, Temperature Coefficient=±400ppm/°C, Tolerance=±5%, Mount="Surface Mount", Resistance=1Ω, Type="Thick Film"
U1: library part CMP-00001-9, "System-on-Chip integrating an ESP32 chip together with a 4 MB SPI flash", JLCPCB Part #=C193707, Manufacturer="Espressif Systems", Part Number=ESP32-PICO-D4, ComponentLink1Description=JLCPCB, ComponentLink1URL=https://jlcpcb.com/partdetail/EspressifSystems-ESP32_PICOD4/C193707
U2: library part CMP-00002-10, "USB-to-UART bridge controller", JLCPCB Part #=C964632, Manufacturer="SILICON LABS", Part Number=CP2102N-A02-GQFN28R, ComponentLink1Description=JLCPCB, ComponentLink1URL=https://jlcpcb.com/partdetail/SiliconLabs-CP2102N_A02GQFN28R/C964632
U3: library part CMP-00007-5, "SOT-23-5 Linear Voltage Regulators (LDO) ROHS", JLCPCB Part #=C3011187, Manufacturer="TECH PUBLIC", ComponentLink1Description=JLCPCB, ComponentLink1URL=https://jlcpcb.com/partdetail/TECHPUBLIC-HT7833/C3011187, Part Number=HT7833
U4: library part CMP-00004-7, "Trans Voltage Suppressor Diode, 25W, 5V V(RWM), Unidirectional, 5 Element, Silicon", JLCPCB Part #=C2831528, Manufacturer="UMW(Youtai Semiconductor Co., Ltd.)", ComponentLink1Description=JLCPCB, ComponentLink1URL=https://jlcpcb.com/partdetail/2985836-PESD5V0L5UY/C2831528, Part Number=PESD5V0L5UY
U5: library part CMP-00016-6, "Solid State Relays 1.25V 60V 0.11Ω 2A AC,DC DIP-4 - MOS Output (PhotoMOS) ROHS 1 Form A(SPST-NO)", Control Current=1mA, Control Voltage=1.16V, Forward Current-Max=50mA, Isolation Voltage-Max=2.5kV, JLCPCB Part #=C62652, Max Operating Temperature=85°C, Min Operating Temperature=-40°C, On-State Current-Max=2A, On-state Resistance-Max=180mR, Input Type=DC, JESD-609 Code=e3, Length=9.3mm, Number of Elements=1, Optoelectronic Device Type="TRANSISTOR OUTPUT SSR", Output Circuit Type=MOSFET, Overall Height=3.9mm, Reach SVHC Compliant=Yes, RoHS Compliant=Yes, Terminal Finish=Tin

## Free pads (board coordinates)
  round 6.35 hole 3.175: MH(5.08,5.08) MH(8.89,90.805) MH(82.55,90.805) MH(85.09,5.08)

## Via types
v1: diameter 0.6, hole 0.3, Top Layer to Bottom Layer, tented both sides, 959 vias
v2: diameter 0.7, hole 0.3, Top Layer to Bottom Layer, tented both sides, 13 vias
v3: diameter 0.6, hole 0.3, Top Layer to Bottom Layer, tented bottom, 10 vias

## Nets (pads, with @x,y where several pads share a name; then routed paths per layer and width w, separated by ;. In a path a pad name is that pad's centre, name@x,y a point inside that pad or via, vN(x,y) a via of type N, cw(c..) or ccw(c..) an arc to the next point about the centre after c; other vN are vias at no path point)
3V3: 3V3.1 C4.1 C5.1 C6.1 C7.2 C8.2 C9.1 C10.2 D4.2 R11.1 R12.1 U1.1 U1.3 U1.4 U1.19 U1.37 U1.43 U1.46 U3.5 | length 17.3
  Top Layer w0.2: v1(42.6,63) R12.1@43.5,63 ; C4.1@45.75,76.45 45.756,76.456 49.644,76.456 D4.2@49.694,76.506
  Top Layer w0.254: C5.1@47.85,69.825 C5.1@48.025,69.825 U1.46@48.025,68.625 ; C6.1@49,69.804 49.173,69.631 49.173,69.404 49.523,69.054 49.523,68.627 U1.43@49.525,68.625 ; U1.19@50.025,61.895 C8.2@50.025,60.675 50.025,60.65 50.198,60.477 50.46,60.477 50.937,60 v2(51,60) 51,59.825 R11.1@52,59.825 ; U1.37@52.525,68.625 52.527,68.627 52.527,69.052 52.725,69.25 C7.2@52.725,69.65 52.75,69.65 52.923,69.823 52.923,70.085 53.275,70.438 53.434,70.438 v1(53.5,70.504)
  Top Layer w0.5: U3.5@43.505,76.45 C4.1@45.75,76.45 v2(45.75,75.075)
  other v1: 45.325,66.825 45,67.825 47.275,69.775
5V: C3.1 D1.1 Q1.2 U3.1 U3.3 | length 19.7
  Top Layer w0.5: Q1.2@27.95,75.65 27.95,74.091 28.638,73.402 D1.1@28.638,73.25 32.875,73.25 34.236,74.611 38.439,74.611 38.5,74.55 U3.3@40.995,74.55 41.04,74.595 42.007,74.595 42.3,74.888 42.3,76.112 42.007,76.405 41.04,76.405 U3.1@40.995,76.45
ADC1_0: R15.2 SENS0.2 U1.5 | length 59.1
  Top Layer w0.2: R15.2@4.75,51.25 SENS0.2@6.5,51.25 ; v1(40.5,68.5) 41.551,68.5 44.041,66.01 U1.5@46.41,66.01
  Bottom Layer w0.2: SENS0.2@6.5,51.25 23.3,51.25 24.05,52 24.05,67.75 24.8,68.5 v1(40.5,68.5)
ADC1_1: R16.2 SENS1.2 U1.6 | length 70.4
  Top Layer w0.2: R16.2@4.75,38.75 SENS1.2@6.5,38.75 ; v1(40.5,67.5) 41.949,67.5 43.939,65.51 U1.6@46.41,65.51
  Bottom Layer w0.2: SENS1.2@6.5,38.75 23.8,38.75 24.525,39.475 24.525,66.725 25.3,67.5 v1(40.5,67.5)
ADC1_2: R17.2 SENS2.2 U1.7 | length 81.7
  Top Layer w0.2: R17.2@4.75,26.25 SENS2.2@6.5,26.25 ; v1(40.5,66.5) 42.339,66.5 43.829,65.01 U1.7@46.41,65.01
  Bottom Layer w0.2: SENS2.2@6.5,26.25 24.325,26.25 25,26.925 25,65.825 25.675,66.5 v1(40.5,66.5)
ADC1_3: R18.2 SENS3.2 U1.8 | length 92.6
  Top Layer w0.2: R18.2@4.75,13.75 SENS3.2@6.5,13.75 ; v1(40.5,65.5) 42.729,65.5 43.629,64.6 44.799,64.6 44.889,64.51 U1.8@46.41,64.51
  Bottom Layer w0.2: SENS3.2@6.5,13.75 6.5,16.9 7.23,17.63 24.705,17.63 25.45,18.375 25.45,64.85 26.1,65.5 v1(40.5,65.5)
ADC1_4: R19.2 SENS4.2 U1.12 | length 15.4
  Top Layer w0.2: SENS4.2@36,56.25 R19.2@37.75,56.25 ; v1(44,59) 46.41,61.41 U1.12@46.41,62.51
  Bottom Layer w0.2: SENS4.2@36,56.25 41.25,56.25 v1(44,59)
ADC1_5: R20.2 SENS5.2 U1.13 | length 24.8
  Top Layer w0.2: SENS5.2@36,43.75 R20.2@37.75,43.75 ; v1(45.5,59) 45.5,59.038 47.025,60.563 U1.13@47.025,61.895
  Bottom Layer w0.2: SENS5.2@36,43.75 37.4,45.15 37.4,51.475 44.9,58.975 45.475,58.975 v1(45.5,59)
ADC1_6: R21.2 SENS6.2 U1.10 | length 49.2
  Top Layer w0.2: SENS6.2@36,31.25 R21.2@37.75,31.25 ; v1(42,61) 43.792,61 45.1,62.308 45.1,63.393 45.217,63.51 U1.10@46.41,63.51
  Bottom Layer w0.2: SENS6.2@36,31.25 36.004,31.254 36.954,31.254 37.6,31.9 37.6,34.266 33.275,38.591 33.275,60 34.882,61.607 39.195,61.607 39.801,61 v1(42,61)
ADC1_7: R22.2 SENS7.2 U1.11 | length 62
  Top Layer w0.2: SENS7.2@36,18.75 R22.2@37.75,18.75 ; v1(43,60) 43.952,60 45.55,61.598 45.55,62.843 45.717,63.01 U1.11@46.41,63.01
  Bottom Layer w0.2: SENS7.2@36,18.75 37.275,18.75 38,19.475 38,34.434 33.675,38.759 33.675,59.825 35.057,61.207 39.029,61.207 40.236,60 v1(43,60)
ADC2_0: R23.2 SENS8.2 U1.24 | length 26.8
  Top Layer w0.2: 40.107,51.25 R23.2@39.75,51.25 39.75,53.517 40.508,54.275 53.325,54.275 54,54.95 54,60.95 53.295,61.655 52.55,61.655 52.525,61.68 U1.24@52.525,61.895 ; 40.19,51.25 SENS8.2@41.5,51.25
ADC2_2: R24.2 SENS9.2 U1.39 | length 53.9
  Top Layer w0.2: SENS9.2@41.5,38.75 R24.2@39.75,38.75 39.75,44.5 43.2,47.95 53.525,47.95 55,49.425 v1(55,66) ; U1.39@51.525,68.625 51.525,70.498 52.579,71.552 53.052,71.552 v1(53.5,72)
  Bottom Layer w0.2: v1(53.5,72) 55,72 55.654,71.346 55.654,66.753 55,66.099 v1(55,66)
ADC2_4: R25.2 SENS10.2 U1.20 | length 51.1
  Top Layer w0.2: R25.2@39.75,26.25 SENS10.2@41.5,26.25 ; U1.20@50.525,61.895 50.535,61.885 50.535,61.416 50.696,61.255 50.715,61.255 50.979,60.991 v1(51.087,60.991)
  Bottom Layer w0.2: SENS10.2@41.5,26.25 50.405,26.25 51.175,27.02 51.175,56.375 52.2,57.4 52.2,58.146 53.871,59.818 53.871,60.962 53.458,61.375 51.551,61.375 51.167,60.991 v1(51.087,60.991)
ADC2_5: R26.2 SENS11.2 U1.18 | length 63.9
  Top Layer w0.2: R26.2@39.75,13.75 SENS11.2@41.5,13.75 ; U1.18@49.525,61.895 49.525,61.224 49.425,61.124 49.425,58.117 49.542,58 v1(51.5,58)
  Bottom Layer w0.2: SENS11.2@41.5,13.75 40.45,13.75 39.746,14.454 39.746,33.254 37.8,35.2 37.8,51.309 44.495,58.004 51.496,58.004 v1(51.5,58)
ADC2_6: R27.2 SENS12.2 U1.17 | length 30.2
  Top Layer w0.2: U1.17@49.025,61.895 49.025,57.672 49.697,57 52,57 v1(53,58) ; SENS12.2@71,56.25 R27.2@72.75,56.25
  Bottom Layer w0.2: v1(53,58) 54,59 68.25,59 SENS12.2@71,56.25
ADC2_7: R28.2 SENS13.2 U1.16 | length 38.8
  Top Layer w0.2: U1.16@48.525,61.895 48.525,57.606 49.631,56.5 52.401,56.5 52.901,57 v1(53,57) ; SENS13.2@71,43.75 R28.2@72.75,43.75
  Bottom Layer w0.2: v1(53,57) 54,57 59.525,51.475 59.525,44.488 60.263,43.75 SENS13.2@71,43.75
ADC2_8: R29.2 SENS14.2 U1.15 | length 51
  Top Layer w0.2: U1.15@48.025,61.895 48.025,57.541 49.566,56 v1(53,56) ; SENS14.2@71,31.25 R29.2@72.75,31.25
  Bottom Layer w0.2: v1(53,56) 53.05,55.95 54.025,55.95 59.125,50.85 59.125,31.985 59.86,31.25 SENS14.2@71,31.25
ADC2_9: R30.2 SENS15.2 U1.14 | length 64
  Top Layer w0.2: U1.14@47.525,61.895 47.525,57.475 49.975,55.025 v1@52.975,55.025 ; SENS15.2@71,18.75 R30.2@72.75,18.75
  Bottom Layer w0.2: v1(52.985,55.015) 52.992,55.023 54.386,55.023 58.725,50.685 58.725,19.482 59.457,18.75 SENS15.2@71,18.75